# Altium PCB EstMeteoPCB.PcbDoc
Units mm, origin at the board's own origin, x right, y up, seen from the top; angles counter-clockwise.
Board outline 105 x 60 mm, 2 copper layers (Top Layer, Bottom Layer), stack 1.671 mm thick; 10 components, 12 nets, 59 pads, 0 vias.
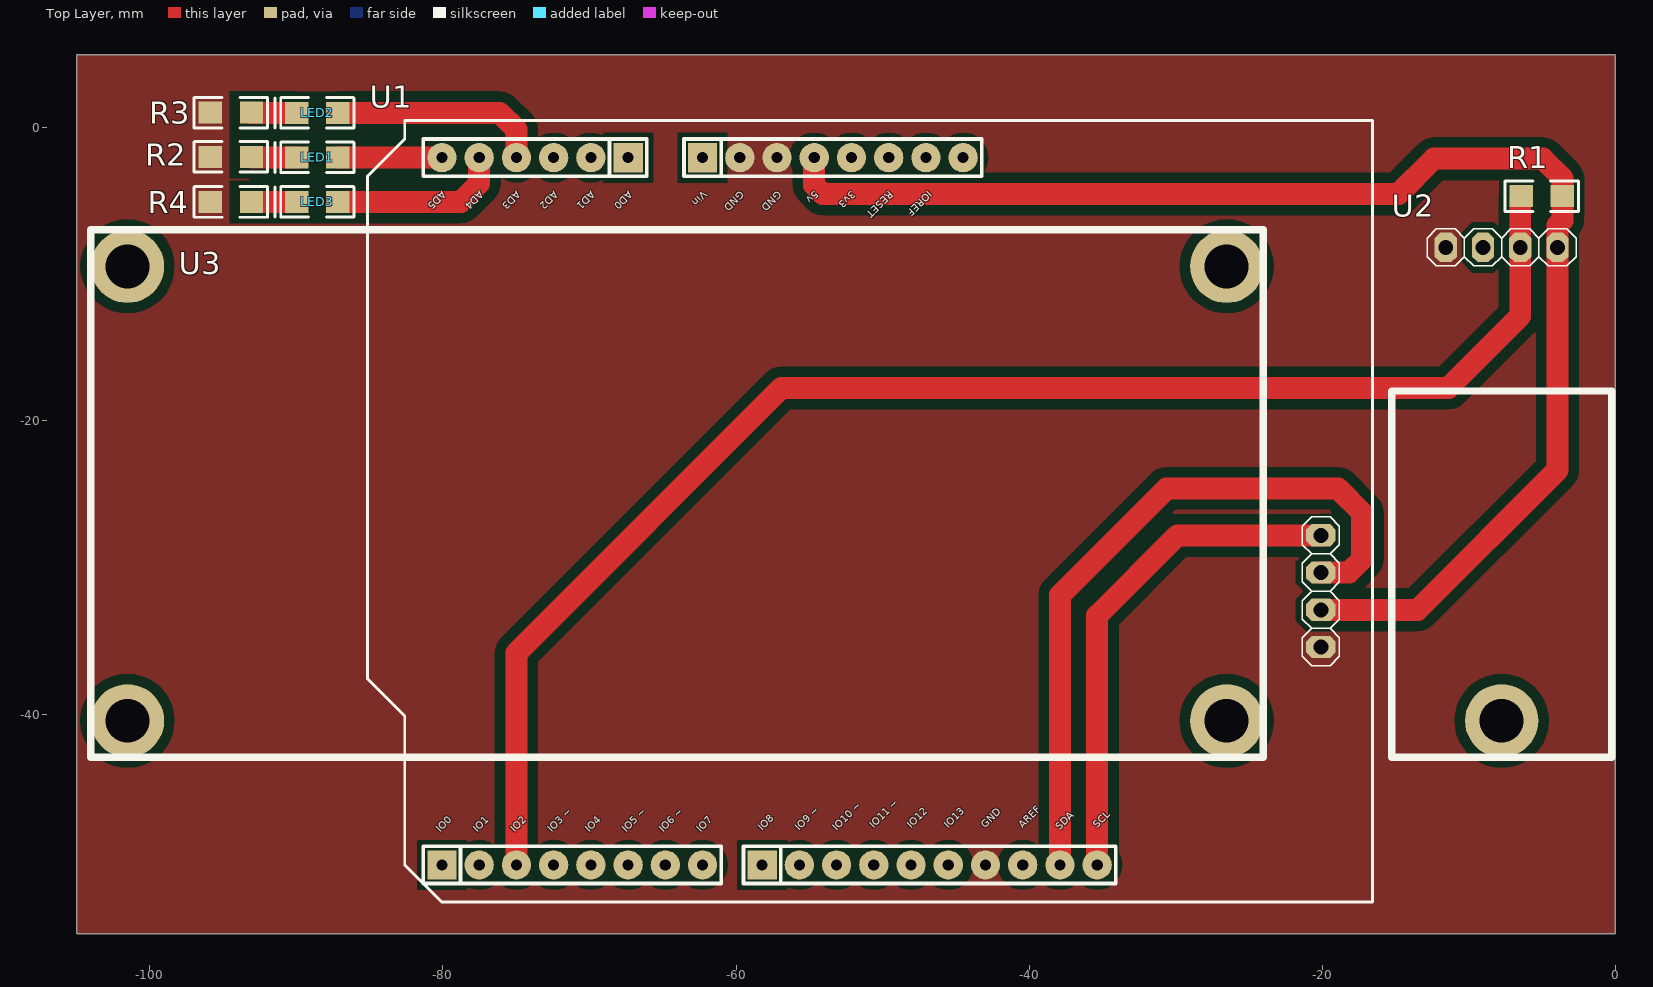
[diagram p0: Top Layer view]
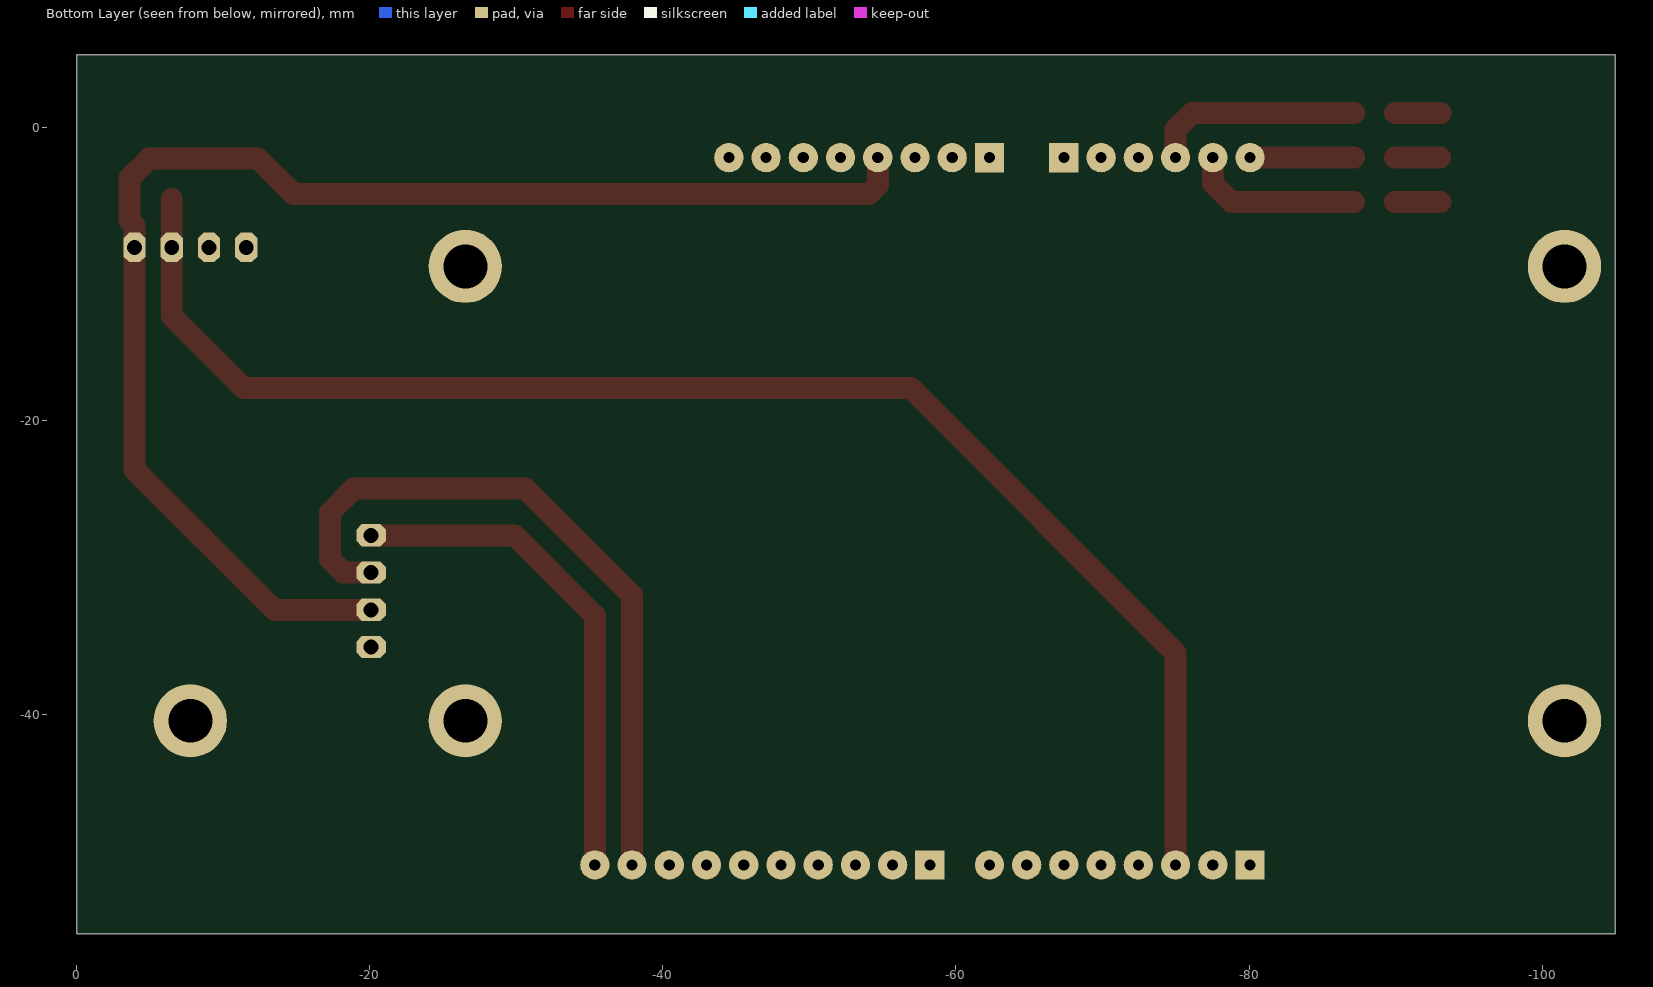
[diagram p1: Bottom Layer view, seen from below]

## Layer stack, top to bottom
Top Solder: solder mask 0.0102, Solder Resist, Dk 3.5
Top Layer: signal copper 0.0356
Dielectric 1: dielectric 1.6, FR-4, Dk 4.8
Bottom Layer: signal copper 0.0356
Bottom Solder: solder mask 0.0102, Solder Resist, Dk 3.5

## Board outline
-105,-55 0,-55 0,5 -105,5

## Design rules (kind name [scope] priority, off if disabled: settings)
Clearance Clearance_Poly [All vs InPolygon] p1: gap=0.7
Clearance [All] p2: gap=0.254
PolygonConnect [All] p1: connectstyle=Direct reliefconductorwidth=0.254 reliefentries=4 polygonreliefangle="90 Angle" airgapwidth=0.254
RoutingVias [All] p1: holewidth=0.711 width=1.27 viastyle="Through Hole" minholewidth=0.711 minwidth=1.27 maxholewidth=0.711 maxwidth=1.27
SolderMaskExpansion [All] p1: expansion=0.102
UnpouredPolygon [All] p1: allowunpoured=FALSE
Width [All] p1: maxlimit=3 minlimit=0.254 preferedwidth=0.254
29 further rules are at their usual default settings.

## Components (designator, comment, footprint, x,y, rotation, side; value= is the part's Value field where it differs from the comment)
LED1 "LED" "LED 1206" -88.57,-2.019 r180 top
LED2 "LED" "LED 1206" -88.57,1.016 r180 top
LED3 "LED" "LED 1206" -88.57,-5.055 r180 top
R1 "10k" "R 1206"#1 -3.277,-6.579 r0 top
R2 "330" "R 1206"#2 -94.463,-1.981 r0 top
R3 "330" "R 1206"#2 -94.463,1.029 r0 top
R4 "330" "R 1206"#2 -94.463,-5.055 r0 top
U1 "ARDUINO UNO SIN MISOMOSI" ARDUINO_SHIELD_SIN_MALE -53.607,-26.133 r180 top
U2 "DHT22" DHT22 -0.267,-36.656 r180 top
U3 "LCD 16x02 I2C" "LCD I2C" -104.026,-6.956 r90 top

## Footprints (in the part's own frame and the unit in brackets; to place one, negate y for a bottom-side part, rotate by r counter-clockwise, add the part's x,y. Pads: shape width x height; smd on the part's side, far side on the other; paste and mask are expansions set on the pad)
ARDUINO_SHIELD_SIN_MALE [mm]
  rect 2x2 hole 0.762: 1(26.46,24.16) 9(4.616,24.16) 30(13.76,-24.1) 31(8.68,-24.1)
  round 2 hole 0.762: 2(23.92,24.16) 3(21.38,24.16) 4(18.84,24.16) 5(16.3,24.16) 6(13.76,24.16) 7(11.22,24.16) 8(8.68,24.16) 10(2.076,24.16) 11(-0.464,24.16) 12(-3.004,24.16) 13(-5.544,24.16) 14(-8.084,24.16) 15(-10.624,24.16) 16(-13.164,24.16) 17(-15.704,24.16) 18(-18.244,24.16) 25(26.46,-24.1) 26(23.92,-24.1) 27(21.38,-24.1) 28(18.84,-24.1) 29(16.3,-24.1) 32(6.14,-24.1) 33(3.6,-24.1) 34(1.06,-24.1) 35(-1.48,-24.1) 36(-4.02,-24.1) 37(-6.56,-24.1) 38(-9.1,-24.1)
  silkscreen extent -37.04,-26.64 31.54,26.7, body extent -19.53,-25.35 27.71,25.45, height 8.15
DHT22 [mm]
  oct 1.524x2.032 hole 1.016: 1(3.69,-28.5) 2(6.23,-28.5) 3(8.77,-28.5) 4(11.31,-28.5)
  round 5 hole 3: ""(7.5,3.8)
  silkscreen extent 0,-29.77 15,6.3, body extent 2.3,-28.64 12.71,-18.58, height 3.79
"LCD I2C" [mm]
  oct 1.524x2.032 hole 1.016: 1(-28.47,-83.924) 2(-25.93,-83.924) 3(-23.39,-83.924) 4(-20.85,-83.924)
  round 5 hole 3: ""(-33.5,-2.5) ""(-33.5,-77.5) ""(-2.5,-2.5) ""(-2.5,-77.5)
  silkscreen extent -36,-85.19 0,0, body extent -29.87,-84.06 -19.46,-74, height 3.79
"LED 1206" [mm]
  rect 1.6x1.5 smd: 1(-1.4,0) 2(1.4,0)
  silkscreen extent -2.51,-1.05 2.89,1.03, body extent -1.61,-0.8 1.59,0.8, height 1.1
"R 1206"#1 [mm]
  rect 1.6x1.5 smd: 1(-3.144,1.911) 2(-0.344,1.911)
  silkscreen extent -4.25,0.86 0.75,2.95, body extent -3.34,1.11 -0.14,2.71, height 1
"R 1206"#2 [mm]
  rect 1.6x1.5 smd: 1(-1.4,0) 2(1.4,0)
  silkscreen extent -2.51,-1.05 2.5,1.03, body extent -1.6,-0.8 1.6,0.8, height 1

## Part data
R1 R2 R3 R4: library part R, "Resistencia"
U2: library part 393, "SENSOR TEMP/HUMIDTY AM2302 DHT22"
U3: library part LCM-S01602DTR/A, "LCD MODULE 16X2 CHARACTER"

## Nets (pads, with @x,y where several pads share a name; then routed paths per layer and width w, separated by ;. In a path a pad name is that pad's centre, name@x,y a point inside that pad or via, vN(x,y) a via of type N, cw(c..) or ccw(c..) an arc to the next point about the centre after c; other vN are vias at no path point)
+3P3V: U1.35
+5V: R1.2 U1.34 U2.1 U3.2 | length 94.9
  Top Layer w1.5: U1.34 -54.667,-3.915 -54.064,-4.518 -14.808,-4.518 -12.399,-2.108 -4.953,-2.108 -3.62,-3.441 R1.2 -3.62,-6.313 -3.957,-6.649 U2.1 -3.957,-23.346 -13.497,-32.886 U3.2
DHT_DATA: R1.1 U1.3 U2.2 | length 100.5
  Top Layer w1.5: U1.3 -74.987,-35.829 -56.909,-17.751 -11.405,-17.751 -6.497,-12.843 U2.2 R1.1@-6.497,-4.844
GND: R2.1 R3.1 R4.1 U1.15 U1.32 U1.33 U2.4 U3.1
LCD_SCL: U1.18 U3.4 | length 34.5
  Top Layer w1.5: U1.18 -35.363,-33.289 -29.88,-27.806 U3.4
LCD_SDA: U1.17 U3.3 | length 49.1
  Top Layer w1.5: U1.17 -37.903,-31.892 -30.62,-24.609 -18.936,-24.609 -17.285,-26.26 -17.285,-29.435 -18.196,-30.346 U3.3
LED_A: LED3.1 U1.26 | length 11.9
  Top Layer w1.5: LED3.1 -78.791,-5.055 -77.527,-3.791 U1.26
LED_R: LED1.1 U1.25 | length 7.1
  Top Layer w1.5: LED1.1@-87.156,-2.033 U1.25
LED_V: LED2.1 U1.27 | length 14.6
  Top Layer w1.5: LED2.1 -76.124,1.016 -74.987,-0.121 U1.27
NetLED1_2: LED1.2 R2.2 | length 3.1
  Top Layer w1.5: R2.2@-93.025,-2.019 LED1.2
NetLED2_2: LED2.2 R3.2 | length 3.1
  Top Layer w1.5: R3.2@-93.05,1.016 LED2.2
NetLED3_2: LED3.2 R4.2 | length 3.1
  Top Layer w1.5: R4.2 LED3.2
pads on no net: U1.1 U1.2 U1.4 U1.5 U1.6 U1.7 U1.8 U1.9 U1.10 U1.11 U1.12 U1.13 U1.14 U1.16 U1.28 U1.29 U1.30 U1.31 U1.36 U1.37 U1.38 U2. U2.3 U3.

## Polygon pours and split planes (outlines as drawn)
GND on Top Layer "gnd" (solid, pour order 2): -105,5 -105,-55 0,-55 0,5

## Silkscreen, mask and mechanical layers (free items; w line width, h text height)
Borde Placa:
  the board outline again, w0.508

## Text inside footprints (layer, text, board x,y; h text height)
U1: Top Overlay "SCL" at -35.363,-47.827 h0.51 r45; Top Overlay "SDA" at -37.903,-47.954 h0.51 r45; Top Overlay "IOREF" at -46.92,-4.245 h0.51 r225; Top Overlay "RESET" at -49.587,-4.245 h0.51 r225; Top Overlay "3v3" at -52.127,-4.245 h0.51 r225; Top Overlay "5v" at -54.667,-4.245 h0.51 r225; Top Overlay "GND" at -57.207,-4.245 h0.51 r225; Top Overlay "GND" at -59.747,-4.245 h0.51 r225; Top Overlay "Vin" at -62.287,-4.245 h0.51 r225; Top Overlay "AD0" at -67.367,-4.245 h0.51 r225; Top Overlay "AD1" at -69.907,-4.245 h0.51 r225; Top Overlay "AD2" at -72.447,-4.245 h0.51 r225; Top Overlay "AD3" at -74.987,-4.245 h0.51 r225; Top Overlay "AD4" at -77.527,-4.245 h0.51 r225; Top Overlay "AD5" at -80.067,-4.245 h0.51 r225; Top Overlay "IO0" at -80.194,-48.081 h0.51 r45; Top Overlay "IO1" at -77.654,-48.081 h0.51 r45; Top Overlay "IO2" at -75.114,-48.081 h0.51 r45; Top Overlay "IO3 ~" at -72.574,-48.081 h0.51 r45; Top Overlay "IO4" at -70.034,-48.081 h0.51 r45; Top Overlay "IO5 ~" at -67.494,-48.081 h0.51 r45; Top Overlay "IO6 ~" at -64.954,-48.081 h0.51 r45; Top Overlay "IO7" at -62.414,-48.081 h0.51 r45; Top Overlay "IO8" at -58.223,-48.007 h0.51 r45; Top Overlay "IO9 ~" at -55.683,-48.007 h0.51 r45; Top Overlay "IO10 ~" at -53.143,-48.007 h0.51 r45; Top Overlay "IO11 ~" at -50.603,-47.827 h0.51 r45; Top Overlay "IO12" at -48.063,-47.827 h0.51 r45; Top Overlay "IO13" at -45.523,-47.827 h0.51 r45; Top Overlay "GND" at -42.983,-47.827 h0.51 r45; Top Overlay "AREF" at -40.443,-47.827 h0.51 r45